# Altium PCB DRV.PcbDoc
Units mil, origin at the board's own origin, x right, y up, seen from the top; angles counter-clockwise.
Board outline 3425 x 3170 mil, 4 copper layers (Top Layer, Layer 1, Layer 2, Bottom Layer), stack 23.756 mil thick; 45 components, 36 nets, 160 pads, 45 vias.
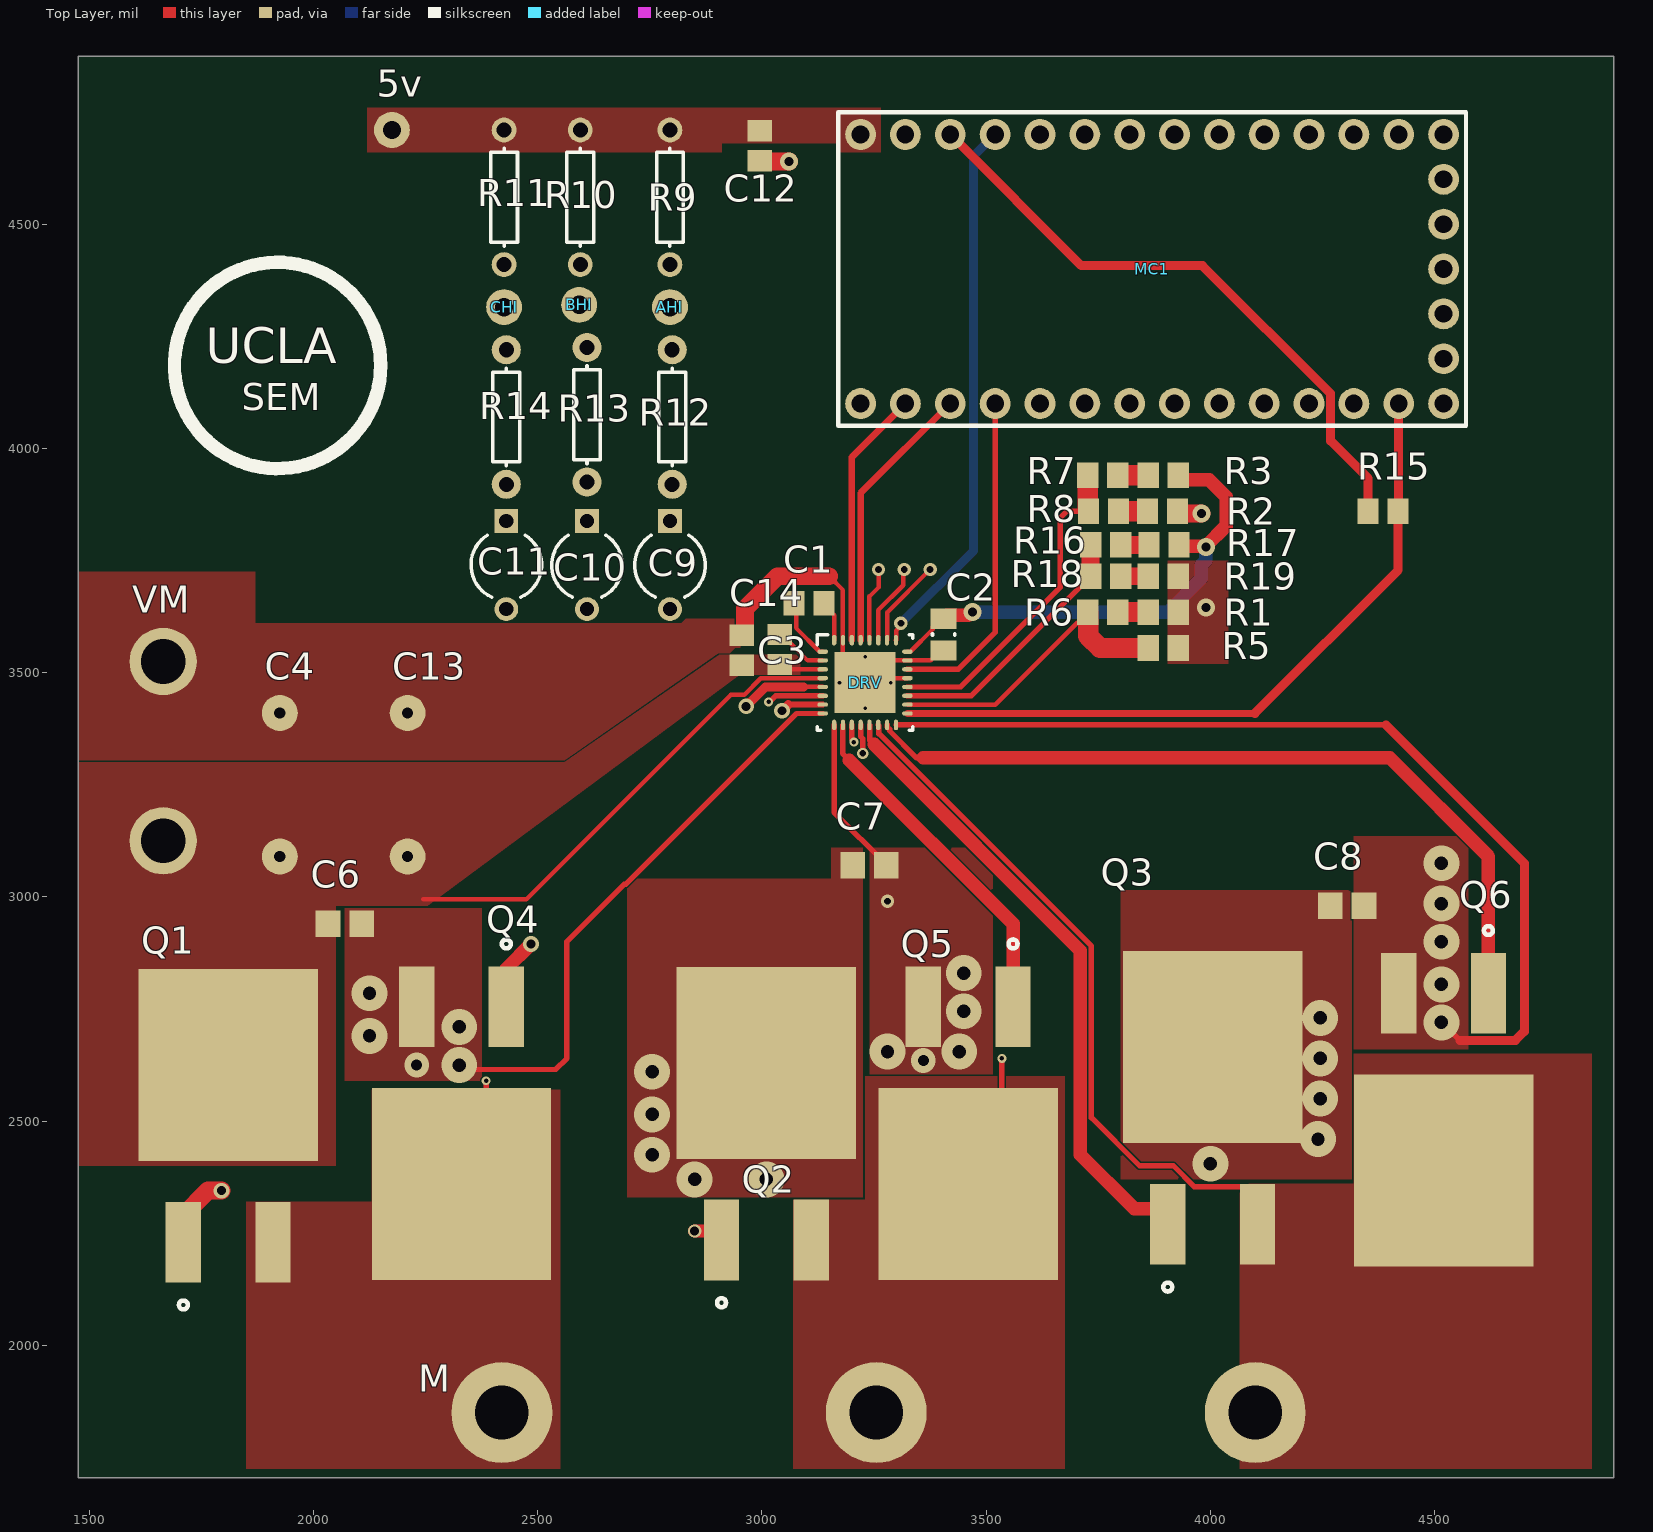
[diagram p0: Top Layer view]
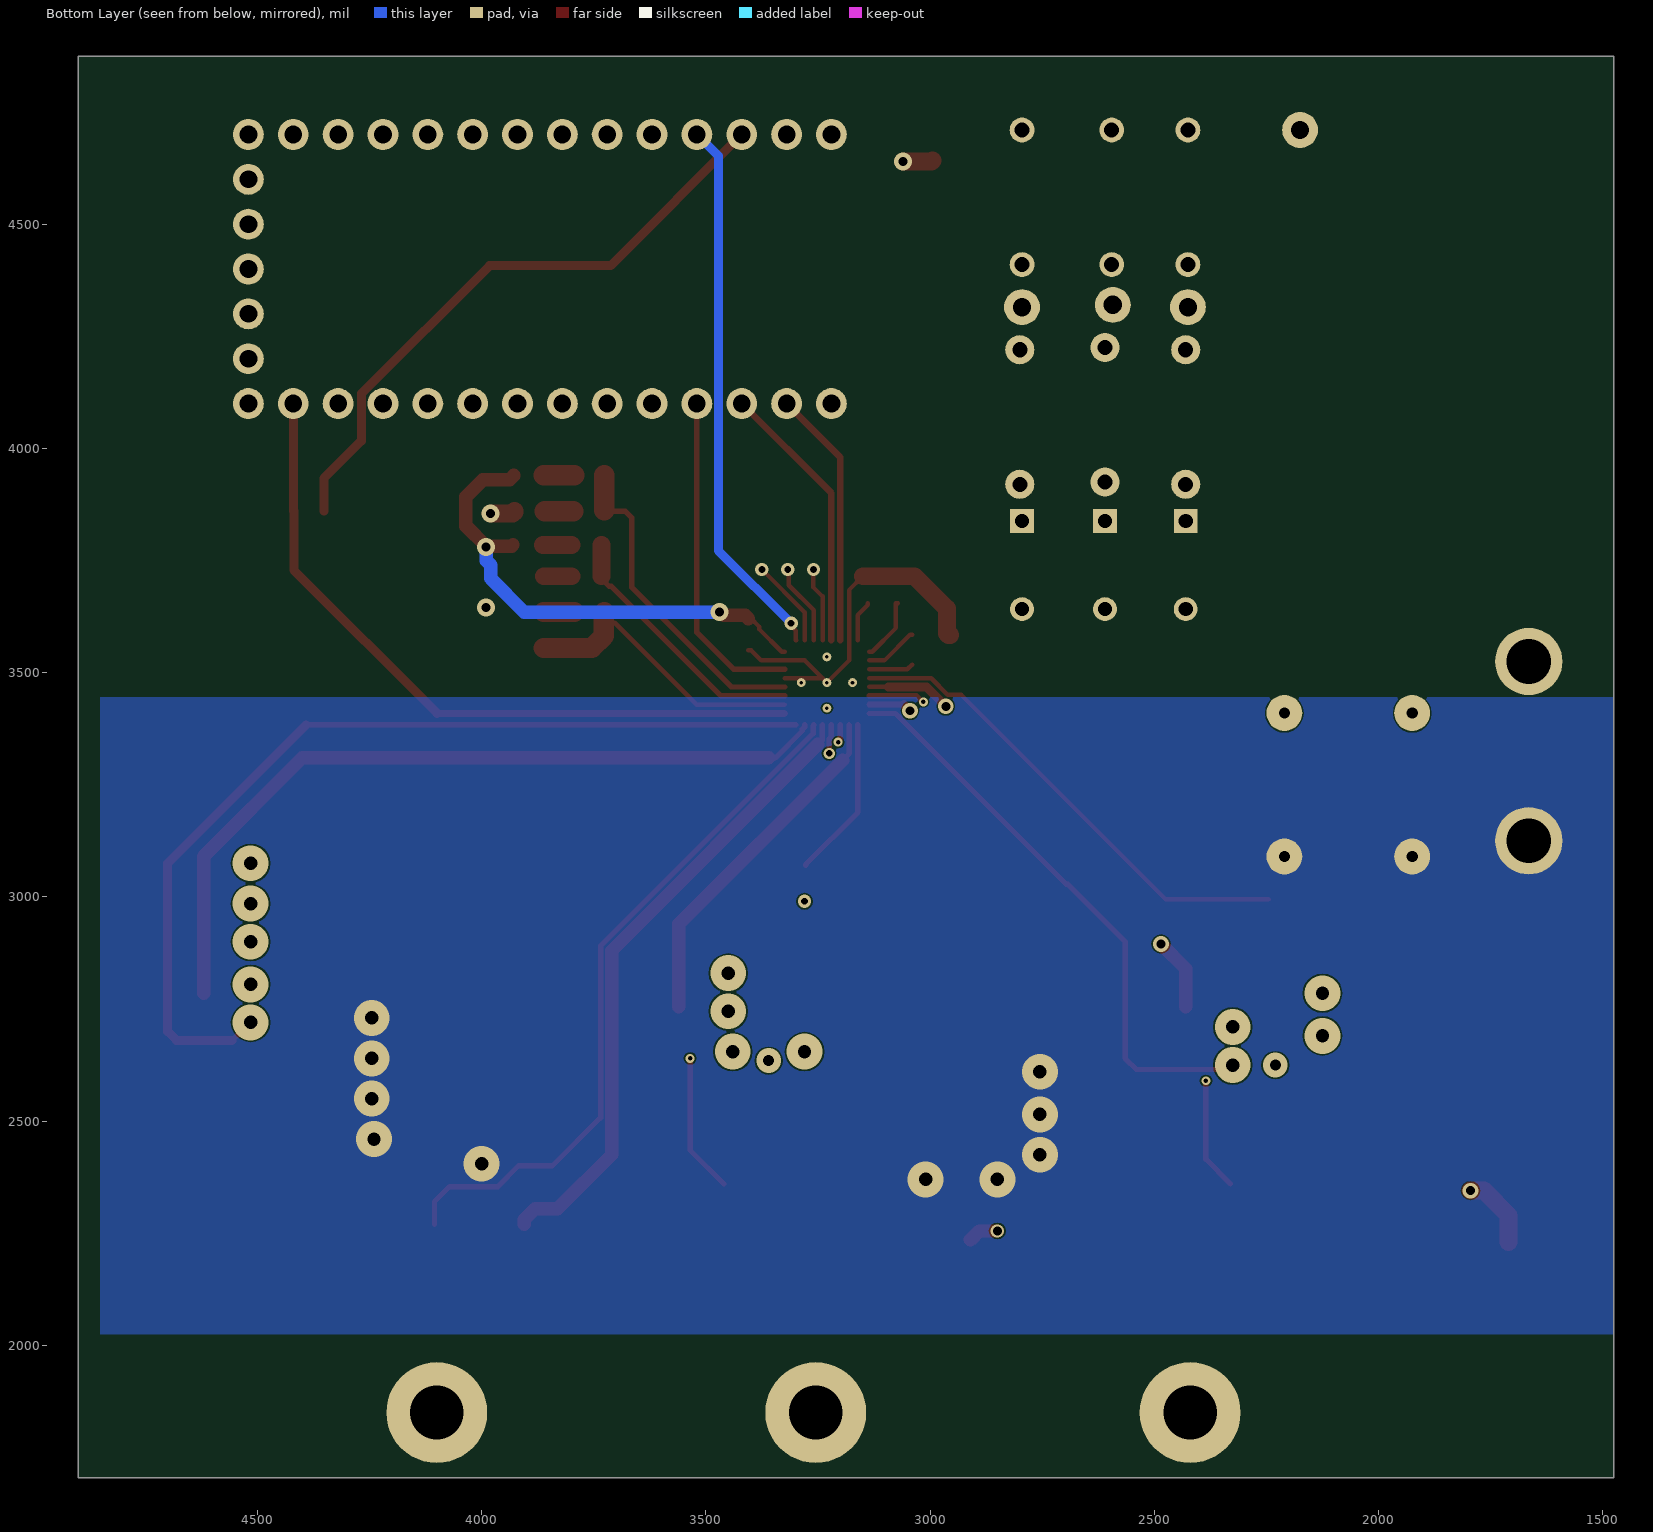
[diagram p1: Bottom Layer view, seen from below]
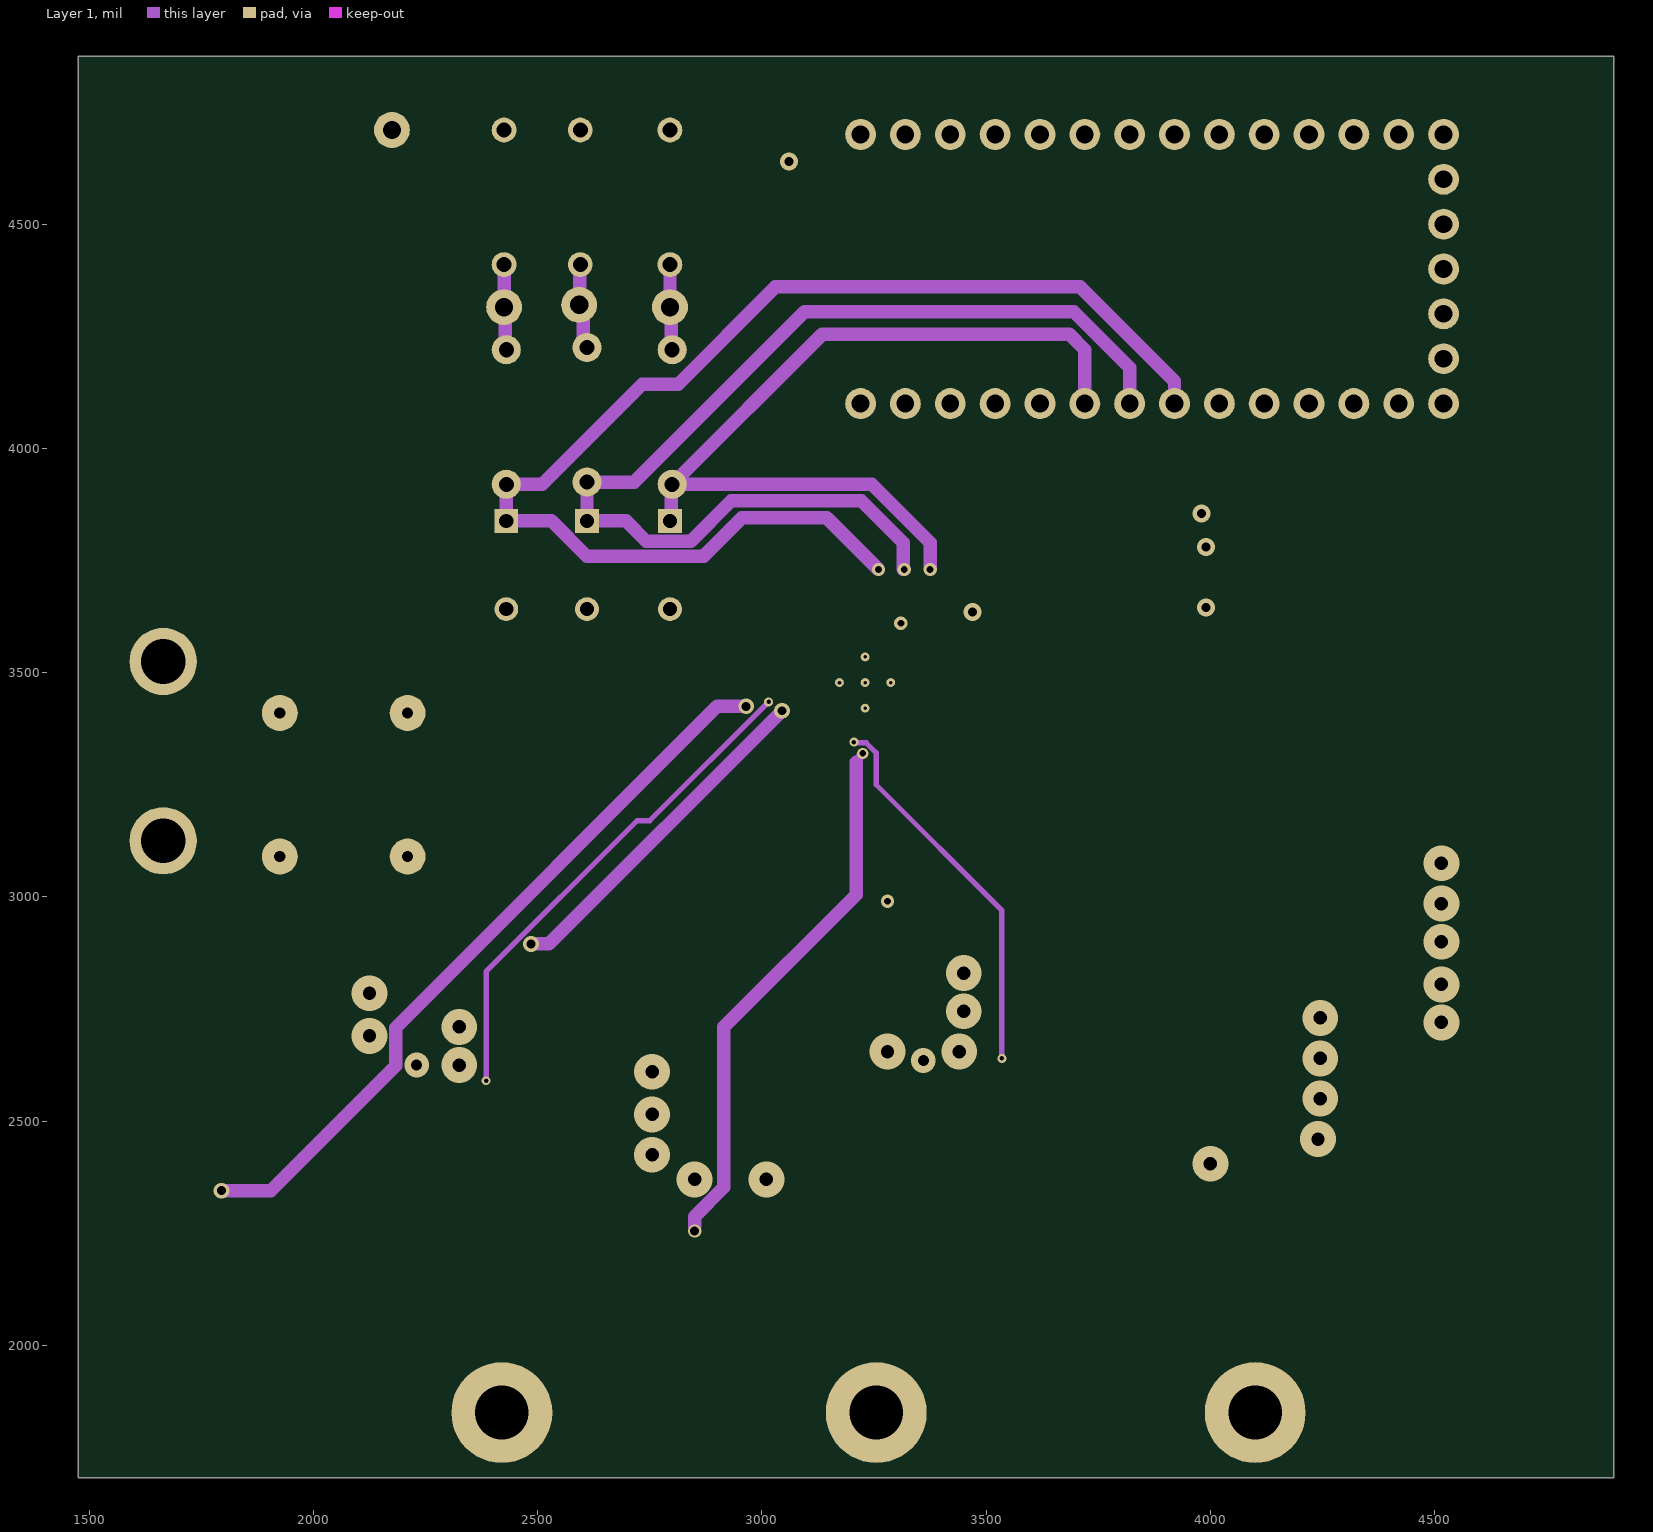
[diagram p2: Layer 1]
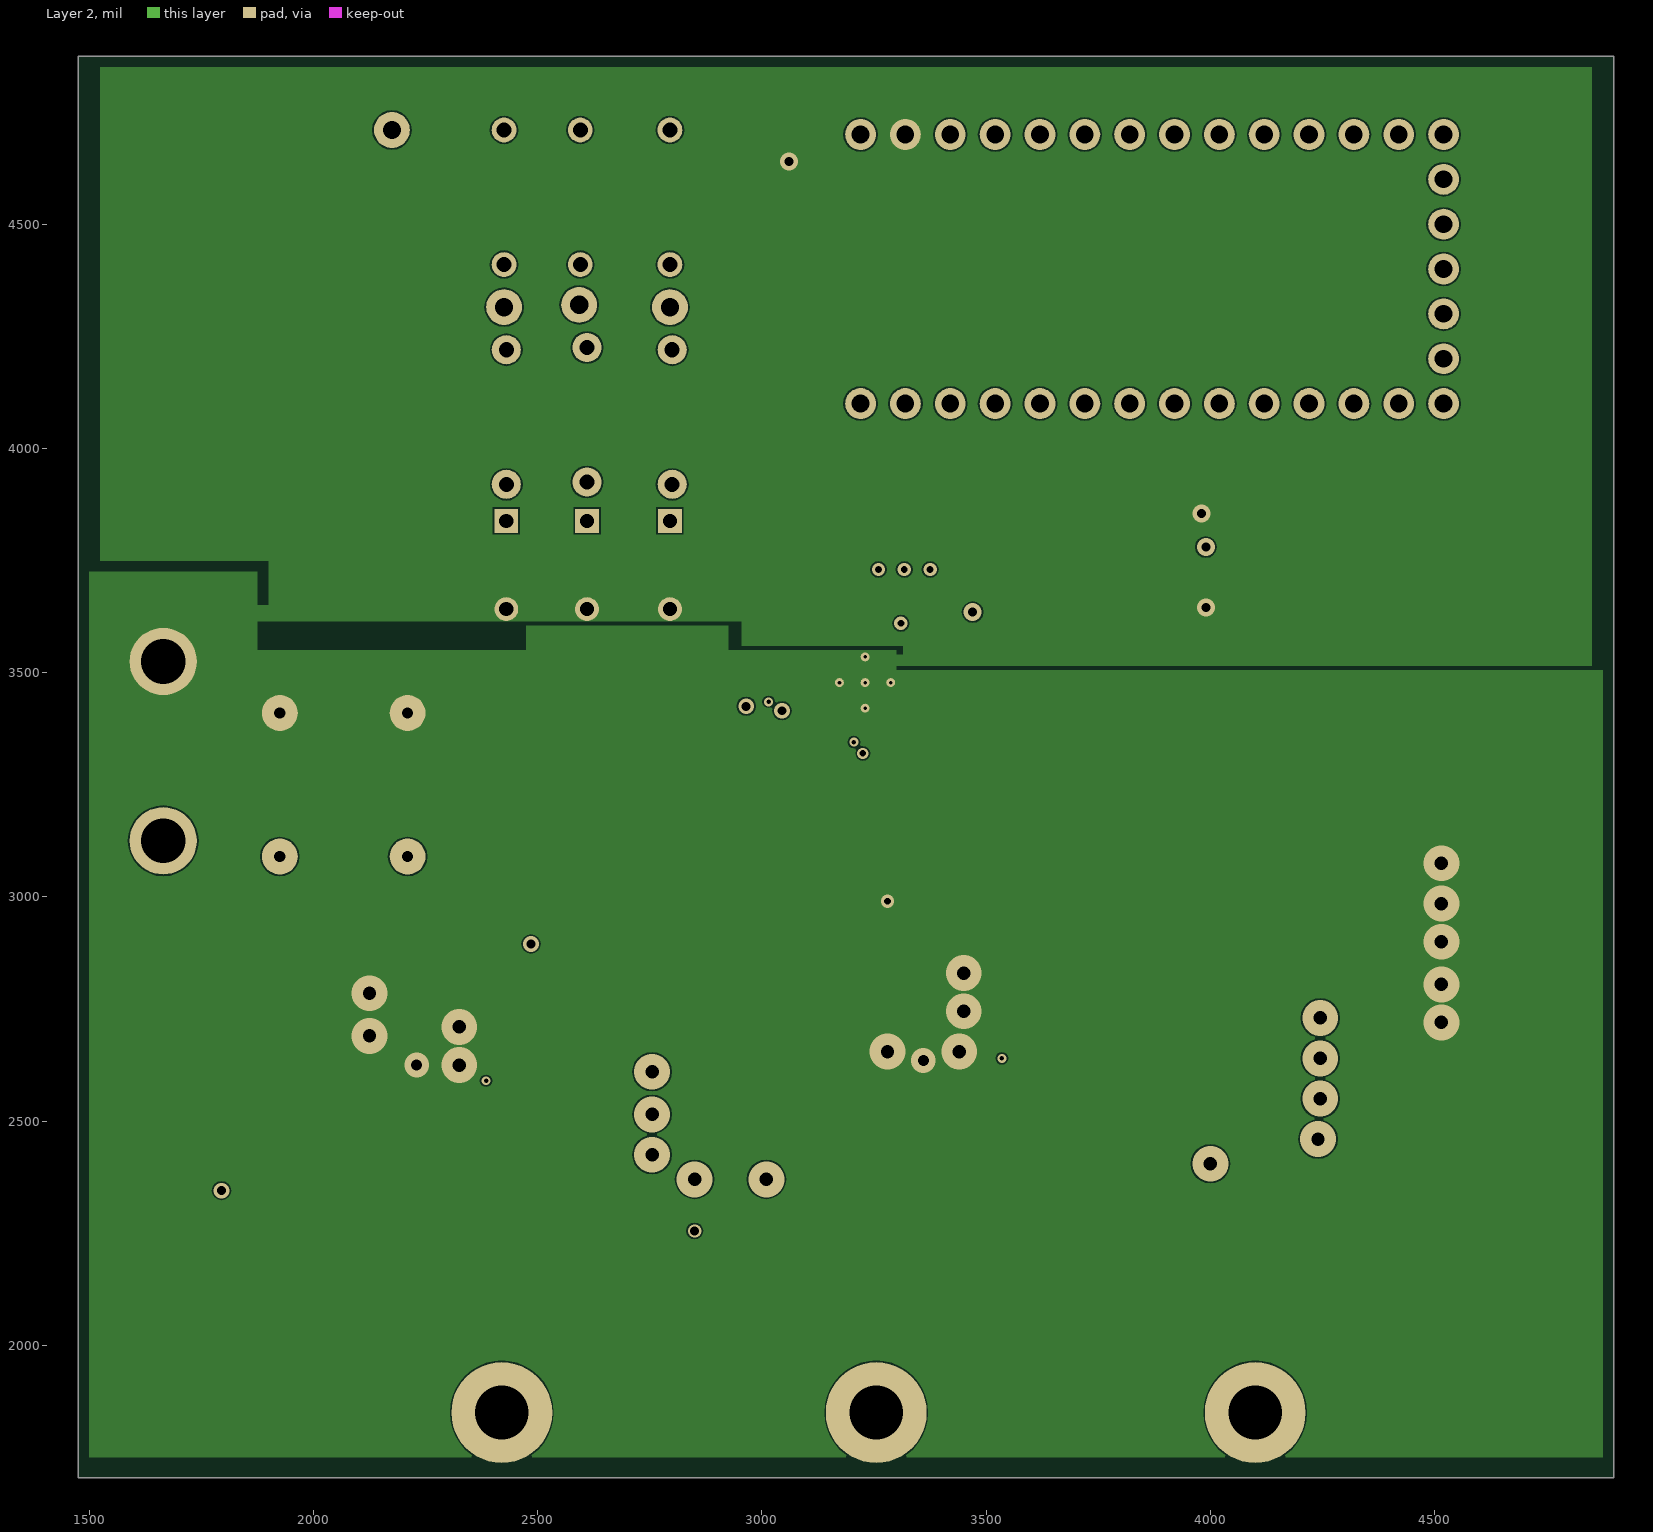
[diagram p3: Layer 2]

## Layer stack, top to bottom
Top Solder: solder mask 0.4, Solder Resist, Dk 3.5
Top Layer: signal copper 1.4
Dielectric 2: prepreg 2.8, PP-006, Dk 4.1
Layer 1: signal copper 1.3779
Dielectric 1: dielectric 12.6, FR-4, Dk 4.8
Layer 2: signal copper 1.3779
Dielectric 3: prepreg 2.8, PP-006, Dk 4.1
Bottom Layer: signal copper 1.4
Bottom Solder: solder mask 0.4, Solder Resist, Dk 3.5

## Board outline
1475,1705 4900,1705 4900,4875 1475,4875

## Design rules (kind name [scope] priority, off if disabled: settings)
Clearance [All] p1: gap=3.5 ignorepadtopadclearanceinfootprint=FALSE except(0: Arc-Hole Track-Hole SMDPad-Hole THPad-Hole Via-Hole Fill-Hole Poly-Hole Region-Hole Text-Hole; 10: Arc-Text Track-Text SMDPad-Text THPad-Text Via-Text Fill-Text Poly-Text Region-Text Text-Text)
PolygonConnect [All] p1: connectstyle=Direct reliefconductorwidth=10 reliefentries=4 polygonreliefangle="90 Angle" airgapwidth=10
RoutingVias [All] p1: holewidth=28 width=50 viastyle="Through Hole" minholewidth=28 minwidth=50 maxholewidth=28 maxwidth=50
SolderMaskExpansion [All] p1: expansion=4
Width [All] p1: maxlimit=1000 minlimit=10 preferedwidth=10
30 further rules are at their usual default settings.

## Components (designator, comment, footprint, x,y, rotation, side; value= is the part's Value field where it differs from the comment)
5v "" "A single pin" 2175,4710 r0 top
AHI "Hall A" "A single pin" 2795,4315 r0 top
BHI "Hall B" "A single pin" 2592.5,4320 r0 top
C1 "47nF" 0805 3105,3655 r180 top
C2 "1uF" CAPC0805(2012)145_N 3405,3585 r270 top
C3 "1uF" 0805 3040,3551.54 r270 top
C4 "100uF" "Electrolytic TH Capacitor" 1925,3250 r180 top value=100pF
C6 "1uF" CAPC2013X135X45ML10T25 2070,2940 r180 top
C7 "1uF" CAPC2013X135X45ML10T25 3240,3070 r180 top
C8 "1uF" CAPC2013X135X45ML10T25 4305,2980 r180 top
C9 "Cap2" CAPR5-4X5 2795,3740 r270 top
C10 "Cap2" CAPR5-4X5 2610,3740 r270 top
C11 "Cap2" CAPR5-4X5 2430,3740 r270 top
C12 "0.1uF" 0805 2995,4675 r90 top
C13 "100uF" "Electrolytic TH Capacitor" 2210,3250 r180 top value=100pF
C14 "0.1uF" 0805 2955,3550 r270 top
CHI "Hall C" "A single pin" 2425,4315 r0 top
DRV "DRV8320HRTVR" RTV0032E 3230,3477.91 r0 top
M "Motor" Motor 3255,1850 r0 top
MC1 "teensy3.2" teensy3.2 3220,4700 r0 top
Q1 "INFINEON" MOSFET-2 1810,2445 r270 top
Q2 "INFINEON" MOSFET-2 3010,2450 r270 top
Q3 "INFINEON" MOSFET-2 4005,2485 r270 top
Q4 "INFINEON" MOSFET-2 2330,2540 r90 top
Q5 "INFINEON" MOSFET-2 3460,2540 r90 top
Q6 "INFINEON" MOSFET-2 4520,2570 r90 top
R1 "1MΩ" RESC2013X60X40NL20T25 3895,3635 r0 top
R2 "1MΩ" RESC2013X60X40NL20T25 3893.46,3860 r0 top
R3 "75Ω" RESC2013X60X40NL20T25 3895,3940 r0 top
R5 "0Ω" RESC2013X60X40NL20T25 3895,3555 r0 top
R6 "0Ω" RESC2013X60X40NL20T25 3760,3635 r0 top
R7 "0Ω" RESC2013X60X40NL20T25 3760,3940 r0 top
R8 "0Ω" RESC2013X60X40NL20T25 3761.54,3860 r0 top
R9 "Res1" AXIAL-0.3#1 2795,4560 r90 top
R10 "Res1" AXIAL-0.3#1 2595,4560 r90 top
R11 "Res1" AXIAL-0.3#1 2425,4560 r90 top
R12 "Res1" AXIAL-0.3#2 2800,4070 r270 top
R13 "Res1" AXIAL-0.3#2 2610,4075 r270 top
R14 "Res1" AXIAL-0.3#2 2430,4070 r270 top
R15 "0Ω" RESC2013X60X40NL20T25 4385,3860 r0 top
R16 "0Ω" RESC2013X60X40NL20T25 3766.54,3785 r0 top
R17 "75Ω" RESC2013X60X40NL20T25 3896.54,3785 r0 top
R18 "0Ω" RESC2013X60X40NL20T25 3766.54,3715 r0 top
R19 "1MΩ" RESC2013X60X40NL20T25 3895,3715 r0 top
VM "Battery" "12 Gauge" 1665,3325 r90 top

## Footprints (in the part's own frame and the unit in brackets; to place one, negate y for a bottom-side part, rotate by r counter-clockwise, add the part's x,y. Pads: shape width x height; smd on the part's side, far side on the other; paste and mask are expansions set on the pad)
"12 Gauge" [mil]
  round 150 hole 100: 1(-200,0) 2(200,0)
0805 [mm] "0805 SMD, 2-Leads, Body 2.00x1.25mm, IPC Medium Density"
  rect 1.2x1.4 smd: 1(-0.85,0) 2(0.85,0)
  body extent -1.05,-0.67 1.05,0.67, height 0.7
"A single pin" [mil]
  round 80 hole 40.94: 0(0,0)
AXIAL-0.3#1 [mm] "Axial Device, Thru-Hole; 2 Leads; 0.3 in Pin Spacing"
  round 1.4 hole 0.85: 1(-3.81,0) 2(3.81,0)
  silkscreen extent -2.77,-0.76 2.77,0.76
AXIAL-0.3#2 [mm] "Axial Device, Thru-Hole; 2 Leads; 0.3 in Pin Spacing"
  round 1.651 hole 0.85: 1(-3.81,0) 2(3.81,0)
  silkscreen extent -2.77,-0.76 2.77,0.76
CAPC0805(2012)145_N [mm] "Chip Capacitor, Body 2.0x1.2mm, Height 1.45mm, IPC Medium Density"
  rect 1.15x1.45 smd: 1(-0.9,0) 2(0.9,0)
  silkscreen extent -0.05,-0.62 0.05,0.63, body extent -1.1,-0.72 1.1,0.73, height 1.45
CAPC2013X135X45ML10T25 [mm] "Chip Capacitor, 2-Leads, Body 2.10x1.35mm, IPC Low Density"
  rect 1.4x1.5 smd: 1(-0.95,0) 2(0.95,0)
  body extent -1.05,-0.67 1.05,0.67, height 1.35
CAPR5-4X5 [mm] "Capacitor; 2 Leads"
  rect 1.35x1.35 hole 0.8: 1(-2.5,0)
  round 1.35 hole 0.8: 2(2.5,0)
  silkscreen extent -1.69,-2 1.82,2
"Electrolytic TH Capacitor" [mil]
  round 80 hole 25: 1(0,160) 2(0,-160)
MOSFET-2 [mil]
  rect 180x78.74 smd: 1(215,-100) 3(215,100)
  rect 428.35x400 smd: 2(-180,0)
  silkscreen extent 345,-110 365,-90
Motor [mil]
  round 225 hole 120: 1(-835,0) 2(0,0) 3(845,0)
RESC2013X60X40NL20T25 [mm] "Chip Resistor, 2-Leads, Body 2.00x1.25mm, IPC Medium Density"
  rect 1.2x1.45 smd: 1(-0.85,0) 2(0.85,0)
  body extent -1.1,-0.72 1.1,0.72, height 0.6
RTV0032E [mm]
  oval 0.6x0.24 smd paste+0 mask+0.051: 1(-2.4,1.75) 2(-2.4,1.25) 3(-2.4,0.75) 4(-2.4,0.25) 5(-2.4,-0.25) 6(-2.4,-0.75) 7(-2.4,-1.25) 8(-2.4,-1.75) 17(2.4,-1.75) 18(2.4,-1.25) 19(2.4,-0.75) 20(2.4,-0.25) 21(2.4,0.25) 22(2.4,0.75) 23(2.4,1.25) 24(2.4,1.75)
  oval 0.24x0.6 smd paste+0 mask+0.051: 9(-1.75,-2.4) 10(-1.25,-2.4) 11(-0.75,-2.4) 12(-0.25,-2.4) 13(0.25,-2.4) 14(0.75,-2.4) 15(1.25,-2.4) 16(1.75,-2.4) 25(1.75,2.4) 26(1.25,2.4) 27(0.75,2.4) 28(0.25,2.4) 29(-0.25,2.4) 30(-0.75,2.4) 31(-1.25,2.4) 32(-1.75,2.4)
  rect 3.45x3.45 smd paste-1.712 mask+0.051: 33(0,0)
  round 0.5 hole 0.203 mask+0.051: V(-1.45,0) V(0,-1.45) V(0,0) V(0,1.45) V(1.45,0)
  silkscreen extent -2.7,-2.7 2.7,2.7, body extent 0,0 0.25,0.25, height 0.25
teensy3.2 [mm]
  round 1.75 hole 1: 1(0,0) 2(2.54,0) 3(5.08,0) 4(7.62,0) 5(10.16,0) 6(12.7,0) 7(15.24,0) 8(17.78,0) 9(20.32,0) 10(22.86,0) 11(25.4,0) 12(27.94,0) 13(30.48,0) 14(33.02,0) 15(33.02,-2.54) 16(33.02,-5.08) 17(33.02,-7.62) 18(33.02,-10.16) 19(33.02,-12.7) 20(33.02,-15.24) 21(30.48,-15.24) 22(27.94,-15.24) 23(25.4,-15.24) 24(22.86,-15.24) 25(20.32,-15.24) 26(17.78,-15.24) 27(15.24,-15.24) 28(12.7,-15.24) 29(10.16,-15.24) 30(7.62,-15.24) 31(5.08,-15.24) 32(2.54,-15.24) 33(0,-15.24)
  silkscreen extent -1.27,-16.51 34.29,1.27

## Part data
5v: library part 10V
AHI BHI CHI: library part "Hall Sensor"
C1: library part C0805C473K5RACTU, "0.047µF 50V 10% X7R 0805", Case/Package=0805, Dielectric=X7R, Dielectric Material=Ceramic, Manufacturer 1=KEMET, Max Operating Temperature=125°C, Min Operating Temperature=-55°C, Supplier Part Number 1=399-1166-1-ND, Tolerance=10%, Voltage Rating (DC)=50V, Capacitance=47nF, ComponentLink1Description=https://datasheet.ciiva.com/22749/1918693-22749589.pdf?src-supplier=Element14, ComponentLink1URL=https://datasheet.ciiva.com/22749/1918693-22749589.pdf?src-supplier=Element14, Depth=1.25mm, Height=0.78mm, Length=2mm, Manufacturer Part Number 1=C0805C473K5RACTU, Mount="Surface Mount", Packaging="Tape and Reel", Pricing 1="1=0.20000, 10=0.13900, 100=0.06550, 500=0.04590, 1000=0.03800 (USD)", Radiation Hardening=No, RoHS=Yes, Stock 1=1440571, Supplier 1=Digi-Key
C2: library part CMP-1036-04731-1, "CAP 1uF 6.3V ±10% 0805 (2012 Metric) Thickness 1.45mm SMD", Case-EIA=0805, Case-Metric=2012, Rated Voltage="6.3 V", Tolerance=±10%, Max Thickness="1.45 mm", Technology=SMT
C3 C12 C14: library part C0805C473K5RACTU, "1µF 50V 10% X7R 0805", Capacitance=47nF, Case/Package=0805, Dielectric=X7R, Dielectric Material=Ceramic, Manufacturer 1=KEMET, Max Operating Temperature=125°C, Min Operating Temperature=-55°C, Supplier Part Number 1=399-1166-1-ND, Tolerance=10%, Voltage Rating (DC)=50V, ComponentLink1Description=https://datasheet.ciiva.com/22749/1918693-22749589.pdf?src-supplier=Element14, ComponentLink1URL=https://datasheet.ciiva.com/22749/1918693-22749589.pdf?src-supplier=Element14, Depth=1.25mm, Height=0.78mm, Length=2mm, Manufacturer Part Number 1=C0805C473K5RACTU, Mount="Surface Mount", Packaging="Tape and Reel", Pricing 1="1=0.20000, 10=0.13900, 100=0.06550, 500=0.04590, 1000=0.03800 (USD)", Radiation Hardening=No, RoHS=Yes, Stock 1=1440571, Supplier 1=Digi-Key
C4 C13: library part "Cap Pol1", "Polarized Capacitor (Radial)", LatestRevisionDate=17-Jul-2002, LatestRevisionNote="Re-released for DXP Platform.", PackageDescription="Polarized Capacitor (Radial); 2 Leads", PackageReference=RB7.6-15, Published=8-Jun-2000, Publisher="Altium Limited"
C6 C7 C8: library part CMP-2100-03644-1, "Chip Capacitor, 1 uF, +/- 10%, 50 V, -55 to 125 degC, 0805 (2012 Metric), RoHS, Tape and Reel", Capacitance=100nF, Case/Package=0805, Case Code (Metric)=2012, Dielectric=X7R, Dielectric Material=Ceramic, Insulation Resistance=10GR, Manufacturer=Murata, Max Operating Temperature=125degC, Min Operating Temperature=-55degC, Package Description="2-Pin Surface Mount Device, Body 2 x 1.25 mm", Package Quantity=1, Tolerance=10%, Voltage=50V, Case Code (Imperial)=0805, Datasheet URL=http://psearch.en.murata.com/capacitor/product/GRM21BR71H104KA01%23.pdf, Datasheet Version=42675.0, Depth=1.25mm, Height=1.25mm, Lead Free=LeadFree, Length=2mm, Manufacturer URL=http://www.murata.com/, Material=Ceramic, Mount=SurfaceMount, Number of Pins=2, Package Reference=0805, Packaging=TapeandReel, Radiation Hardening=No, REACH SVHC=Unknown, RoHSCompliant=true, Termination=SMD/SMT, Thickness=0.053inch, Voltage Rating=50V, Voltage Rating (DC)=50V, Width=0.049inch
DRV: Manufacturer 1="Texas Instruments", Max Operating Temperature=125°C, Min Operating Temperature=-40°C, Supplier Part Number 1=296-48909-1-ND, Manufacturer Part Number 1=DRV8320HRTVR, Pricing 1="1=3.07000, 10=2.75800, 100=2.25960, 500=1.92352, 1000=1.62225 (USD)", RoHS=No, Stock 1=7874, Supplier 1=Digi-Key
R1 R2 R3 R5 R6 R7 R8 R15 R16 R17 R18 R19: library part CMP-2001-00629-1, Manufacturer=Panasonic, Part Number=ERA6AEB332V
R9 R10 R11 R12 R13 R14: "Resistor", LatestRevisionDate=17-Jul-2002, LatestRevisionNote="Re-released for DXP Platform.", PackageDescription="Axial Device, Thru-Hole; 2 Leads; 0.3 in Pin Spacing", PackageReference=AXIAL-0.3, Published=8-Jun-2000, Publisher="Altium Limited"
C9 C10 C11: PackageDescription="Capacitor; 2 Leads", PackageReference=CAPR5-4X5, Published=23-Sep-2002, Publisher="Altium Limited"

## Via types
v1: diameter 80, hole 30, Top Layer to Bottom Layer, 23 vias
v2: diameter 30, hole 15, Top Layer to Bottom Layer, 5 vias
v3: diameter 40, hole 20, Top Layer to Bottom Layer, 5 vias
v4: diameter 20, hole 10, Top Layer to Bottom Layer, 4 vias
v5: diameter 35, hole 20, Top Layer to Bottom Layer, 4 vias
v6: diameter 55, hole 25, Top Layer to Bottom Layer, 2 vias
v7: diameter 30, hole 20, Top Layer to Bottom Layer, 1 vias
v8: diameter 25, hole 15, Top Layer to Bottom Layer, 1 vias

## Nets (pads, with @x,y where several pads share a name; then routed paths per layer and width w, separated by ;. In a path a pad name is that pad's centre, name@x,y a point inside that pad or via, vN(x,y) a via of type N, cw(c..) or ccw(c..) an arc to the next point about the centre after c; other vN are vias at no path point)
DVDD: C2.1 DRV.24 R3.2 R17.2 | length 1120.5
  Top Layer w10: DRV.24 3331.02,3546.81 3381.46,3597.24 3381.46,3602.8 3399.09,3620.43 C2.1
  Top Layer w30: C2.1 3412.64,3628.07 3460.36,3628.07 3467.29,3635 v3(3470,3635) ; R3.2 3928.46,3938.96 3937.09,3930.34 3997.09,3930.34 4035,3892.43 4035,3826.92 3990,3781.92 v3(3990,3780) 3988.09,3781.91 3933.09,3781.91 R17.2
  Bottom Layer w30: v3(3470,3635) 3905,3635 3980,3710 3980,3740 3990,3750 v3(3990,3780)
GND: C2.2 C4.2 C6.1 C7.1 C8.1 C9.2 C10.2 C11.2 C12.1 C13.2 C14.1 DRV.8 DRV.9 DRV.16 DRV.21 DRV.23 DRV.31 DRV.33 DRV.V MC1.2 Q4.3 Q5.3 Q6.3 R1.2 R2.2 R5.2 R19.2 VM.2 | length 4734.3
  Top Layer w10: 3150,3715 3180.79,3684.21 DRV.31 3180.79,3527.13 DRV.33 DRV.33@3239.84,3487.76 ; DRV.21 DRV.33@3239.84,3487.76 ; C2.2 3399.09,3549.57 3376.65,3527.13 DRV.23 3279.21,3527.13 DRV.33@3239.84,3487.76
  Top Layer w12: v1(2325,2625) 2335,2615 2540,2615 2565,2640 2565,2900 2693.41,3028.41 2696.59,3028.41 3056.18,3388 3077.2,3409.02 DRV.8 ; DRV.9 3161.1,3188.27 3277.4,3071.97 C7.1 ; DRV.16 4391.57,3383.43 ; v1(4515,2720) 4517.02,2720 4557.02,2680
  Top Layer w20: 4391.57,3383.43 4700,3075 4700,2700 4680,2680 4557.02,2680
  Top Layer w40: C14.1 2958.94,3583.46 2962.56,3587.09 2962.56,3642.56 3035,3715 3150,3715 ; C12.1 2996.54,4640 v3(3060,4640) ; R2.2 3926.93,3858.62 3930.55,3855 v3(3980,3855)
  other v1: 3280,2655 3440,2655 2125,2690 2325,2710 3450,2745 2125,2785 4515,2805 3450,2830 4515,2900 4515,2985 4515,3075
  other v2: 3280,2990
  other v3: 3990,3645
  other v6: 2230,2625 3360,2635
Net5v_0: 5v.0 C12.2 MC1.1 R9.2 R10.2 R11.2
NetAHI_0: AHI.0 R9.1 R12.1 | length 192.1
  Layer 1 w30: R9.1 AHI.0 2797.5,4312.5 2797.5,4222.5 R12.1
NetBHI_0: BHI.0 R10.1 R13.1 | length 193.3
  Layer 1 w30: R10.1 2593.75,4408.75 2593.75,4321.25 BHI.0 2602.07,4310.43 2602.07,4242.4 2610,4234.47 R13.1
NetC1_1: C1.1 DRV.32 | length 92
  Top Layer w10: C1.1 3138.46,3651.06 3161.1,3628.43 DRV.32
NetC1_2: C1.2 DRV.1 | length 141.2
  Top Layer w10: C1.2 3076.06,3655 3076.06,3599.73 3128.98,3546.81 DRV.1
NetC3_1: C3.1 DRV.2 | length 119.5
  Top Layer w10: C3.1 3043.94,3585 3101.81,3527.13 DRV.2
NetC9_1: C9.1 DRV.26 MC1.28 R12.2 | length 2158
  Top Layer w10: DRV.26 3280,3573.19 3280,3635 v2(3375,3730)
  Layer 1 w30: C9.1 2797.5,3840.93 2797.5,3917.5 R12.2 ; v2@3375,3735 3375,3790 3245,3920 R12.2 ; MC1.28 3720,4220 3685,4255 3135,4255 R12.2
NetC10_1: C10.1 DRV.27 MC1.27 R13.2 | length 2627.1
  Top Layer w10: DRV.27 3259.53,3639.53 3315,3695 3315,3727.5 v2(3317.5,3730)
  Layer 1 w30: v2@3315,3730 3315,3790 3221.5,3883.5 2932,3883.5 2841.85,3793.35 2742.16,3793.35 2697.08,3838.43 C10.1 R13.2 2715,3925 3095,4305 3695,4305 3820,4180 MC1.27
NetC11_1: C11.1 DRV.28 MC1.26 R14.2 | length 3002.2
  Top Layer w10: DRV.28 3239.84,3669.84 3260,3690 v2(3260,3730)
  Layer 1 w30: v2(3260,3730) 3145,3845 2955,3845 2869.85,3759.85 2609.26,3759.85 2530.69,3838.43 C11.1 R14.2 2510,3920 2733.35,4143.35 2813.35,4143.35 3030,4360 3710,4360 3920,4150 MC1.26
NetCHI_0: CHI.0 R11.1 R14.1 | length 192.1
  Layer 1 w30: R11.1 CHI.0 2427.5,4312.5 2427.5,4222.5 R14.1
NetDRV_5: DRV.5 Q1.1 | length 2023.3
  Top Layer w10: 3093.07,3468.07 DRV.5
  Top Layer w20: v5(2965,3425) 3008.07,3468.07 3093.07,3468.07
  Top Layer w40: Q1.1 1710,2290 1765,2345 v5(1795,2345)
  Layer 1 w30: v5(1795,2345) 1905,2345 2183.5,2623.5 2183.5,2708.5 2900,3425 v5(2965,3425)
NetDRV_6: DRV.6 M.1 Q1.3 Q4.2 | length 1501.3
  Top Layer w12: Q4.2 2385,2415 v4(2385,2590) ; v4(3015,3435) 3017.16,3435 3030.55,3448.39 DRV.6
  Layer 1 w12: v4(2385,2590) 2385,2833.18 2721.56,3169.74 2749.74,3169.74 v4(3015,3435)
NetDRV_7: DRV.7 Q4.1 | length 1034.4
  Top Layer w13: 3058.7,3428.7 DRV.7
  Top Layer w20: v5(3045,3415) 3058.7,3428.7
  Top Layer w30: Q4.1 2430,2840 v5(2485,2895)
  Layer 1 w30: v5(2485,2895) 2525,2895 v5(3045,3415)
NetDRV_10: DRV.10 Q5.1 | length 786.2
  Top Layer w12: DRV.10 3180,3382.64 3180,3320 3195,3305
  Top Layer w30: 3195,3305 3560,2940 Q5.1
NetDRV_11: DRV.11 M.2 Q2.3 Q5.2 | length 1208.4
  Top Layer w12: DRV.11 3200.47,3351.69 3205,3347.16 v4(3205,3345) ; Q5.2 3535,2435 v4(3535,2640)
  Layer 1 w12: v4(3205,3345) 3206.53,3343.47 3232.64,3343.47 3255,3321.11 3255,3250 3535,2970 v4(3535,2640)
NetDRV_12: DRV.12 Q2.1 | length 1344.2
  Top Layer w12: DRV.12 3220,3383.27 3220,3357.58 3225,3352.58 v8(3225,3320)
  Top Layer w30: v7(2850,2255) 2890,2255 Q2.1
  Layer 1 w20: 3210,3300 3210,3303.65 3225,3318.65 v8(3225,3320)
  Layer 1 w30: v7@2850,2265 2850,2287.27 2915,2352.27 2915,2710 3210,3005 3210,3300
NetDRV_13: DRV.13 Q3.1 | length 1418.6
  Top Layer w12: DRV.13 3240.5,3382.77 3240.5,3349.5 3250,3340
  Top Layer w30: 3250,3340 3710,2880 3710,2425 3830,2305 3880.63,2305 3905,2280.63 Q3.1
NetDRV_14: DRV.14 M.3 Q3.3 Q6.2 | length 1571
  Top Layer w12: DRV.14 3260.8,3382.15 3260.8,3363.85 3734.5,2890.15 3734.5,2507.89 3841.95,2400.45 3917.36,2400.45 3963.81,2354 4071.63,2354 4105,2320.63 Q3.3
NetDRV_15: DRV.15 Q6.1 | length 1771.7
  Top Layer w12: DRV.15 3279.21,3378.89 3284.67,3373.43 3284.67,3370.45 3345.12,3310 3360,3310
  Top Layer w30: 3360,3310 4400,3310 4620,3090 Q6.1
NetDRV_17: DRV.17 MC1.21 R15.2 | length 1598.5
  Top Layer w15: DRV.17 4099.02,3409.02
  Top Layer w20: 4099.02,3409.02 4418.46,3728.46 R15.2 4419.23,3860.77 4419.23,4099.23 MC1.21
NetDRV_18: DRV.18 R5.1 R6.1 | length 689.3
  Top Layer w10: DRV.18 3520.24,3428.7 3702.99,3611.46 3707.91,3611.46 3726.54,3630.08 R6.1
  Top Layer w45: R6.1 3727.66,3633.88 3727.66,3581.36 3754.02,3555 R5.1
NetDRV_19: DRV.19 R16.1 R18.1 | length 591.9
  Top Layer w12: DRV.19 3466.46,3448.39 3710.53,3692.46 3715.45,3692.46 3733.07,3710.08 R18.1
  Top Layer w40: R18.1 R16.1
NetDRV_20: DRV.20 R7.1 R8.1 | length 737.4
  Top Layer w10: R8.1@3726.54,3861.54 R8.1
  Top Layer w12: DRV.20 3443.07,3468.07 3665,3690 3665,3845 3680,3860 R8.1
  Top Layer w45: R8.1@3726.54,3861.54 R7.1
NetDRV_22: DRV.22 MC1.30 | length 739.7
  Top Layer w12: DRV.22 3437.44,3507.44 3520,3590 MC1.30
NetDRV_25: DRV.25 MC1.4 | length 1219.2
  Top Layer w10: DRV.25 3299.17,3572.68 3299.17,3593.76 3310,3604.59 v2(3310,3610)
  Bottom Layer w20: v2(3310,3610) 3472.05,3772.05 3472.05,4652.05 MC1.4
NetDRV_29: DRV.29 MC1.31 | length 610.4
  Top Layer w15: DRV.29 3220.16,3900.16 MC1.31
NetDRV_30: DRV.30 MC1.32 | length 577.1
  Top Layer w15: DRV.30 3200.47,3980.47 MC1.32
NetMC1_3: MC1.3 R15.1 | length 1384
  Top Layer w20: MC1.3 3712.18,4407.82 3982.18,4407.82 4267.95,4122.05 4267.95,4017.05 4351.54,3933.46 R15.1
NetR1_1: R1.1 R6.2 | length 68.1
  Top Layer w45: R6.2 R1.1
NetR2_1: R2.1 R8.2 | length 65
  Top Layer w45: R8.2 R2.1
NetR3_1: R3.1 R7.2 | length 68.1
  Top Layer w45: R7.2 R3.1
NetR16_2: R16.2 R17.1 | length 63.1
  Top Layer w40: R16.2 R17.1
NetR18_2: R18.2 R19.1 | length 61.5
  Top Layer w40: R18.2 R19.1
VM: C3.2 C4.1 C6.2 C7.2 C8.2 C13.1 C14.2 DRV.3 DRV.4 Q1.2 Q2.2 Q3.2 VM.1 | length 1194.5
  Top Layer w10: 2245,2995 2475,2995 2931,3451 2961,3451 2997.76,3487.76 DRV.4 ; C3.2 3050.63,3507.44 DRV.3
  other v1: 2850,2370 3010,2370 4000,2405 2755,2425 4240,2460 2755,2515 4245,2550 2755,2610 4245,2640 4245,2730
pads on no net: MC1.5 MC1.6 MC1.7 MC1.8 MC1.9 MC1.10 MC1.11 MC1.12 MC1.13 MC1.14 MC1.15 MC1.16 MC1.17 MC1.18 MC1.19 MC1.20 MC1.22 MC1.23 MC1.24 MC1.25 MC1.29 MC1.33

## Polygon pours and split planes (outlines as drawn)
VM on Bottom Layer "Bottom Layer-VM" (solid, pour order 6): 1475,3445 1475,2025 4850,2025 4850,3445
no net on Bottom Layer "Bottom Layer-No Net" (solid, pour order 4): 1475,3365
no net on Bottom Layer "Bottom Layer-No Net 1" (solid, pour order 2): 1475,3250
no net on Bottom Layer "Bottom Layer-No Net 2" (solid, pour order 0): 1495,3245
VM on Top Layer (solid, pour order 34): 2700,3025 2700,2330 3225,2330 3225,3110 3155,3110 3155,3040 2700.38,3040
NetDRV_6 on Top Layer "Top Layer-NetDRV_6" (solid, pour order 12): 1850,1725 1850,2320 2130,2320 2130,2570 2550,2570 2550,1725
GND on Top Layer (solid, pour order 50): 4320,2660 4320,3135 4575,3135 4575,2660
no net on Top Layer (solid, pour order 48): 4320,3135
GND on Top Layer (solid, pour order 46): 3240,3110 3240,2605 3515,2605 3515,3110
GND on Top Layer (solid, pour order 44): 2070,2975 2070,2590 2375,2590 2375,2975
Net5v_0 on Top Layer (solid, pour order 42): 2120,4760 2120,4660 2910,4660 2910,4680 3175,4680 3175,4660 3265,4660 3265,4760
no net on Top Layer (solid, pour order 40): 2095,4775
GND on Top Layer (solid, pour order 38): 3905,3750 3905,3520 4040,3520 4040,3750
VM on Top Layer (solid, pour order 36): 3800,3015 3800,2370 4315,2370 4315,3015
VM on Top Layer (solid, pour order 18): 3085,3540 2905.2,3540 2559.6,3300 2050,3300 2050,2979.53 2050.47,2980 2255,2980 2950.7,3495 3085,3495
GND on Top Layer (solid, pour order 26): 1475,3725 1475,3305 2690,3305 2940,3555 2995,3555 2995,3620 2830,3620 2820,3610 1870,3610 1870,3725
NetDRV_14 on Top Layer "Top Layer-NetDRV_14" (solid, pour order 16): 4065,2360 4065,1725 4850,1725 4850,2650 4320,2650 4320,2360
NetDRV_11 on Top Layer "Top Layer-NetDRV_11" (solid, pour order 14): 3070,2325 3070,1725 3675,1725 3675,2600 3230,2600 3230,2325
no net on Top Layer "Top Layer-No Net" (solid, pour order 10): 1870,2320
VM on Top Layer "Top Layer-VM" (solid, pour order 8): 1475,3300 1475,2400 2050,2400 2050,3300
GND on Layer 2 (solid, pour order 22): 1500,3725 1500,1750 4875,1750 4875,3505 3300,3505 3300,3550 1875,3550 1875,3725
GND on Layer 2 (solid, pour order 30): 1860,3615 2955,3615 2955,3560 3315,3560 3315,3540 3285,3540 3285,3515 4850,3515 4850,4850 1525,4850 1525,3750 1900,3750 1900,3650 1860,3650
GND on Layer 2 (solid, pour order 28): 2475,3530 2475,3605 2925,3605 2925,3524.64
no net on Layer 2 (solid, pour order 20): 1480,3725

## Silkscreen, mask and mechanical layers (free items; w line width, h text height)
Top Overlay:
  circle w30: c1920,4185 r230
  text "UCLA" at 1760,4190 h80
  text "SEM" at 1840,4085 h60
Mechanical 1:
  the board outline again, w30